# Altium PCB system.PcbDoc
Units mm, origin at the board's own origin, x right, y up, seen from the top; angles counter-clockwise.
Board outline 25.03 x 28.54 mm, 2 copper layers (Top Layer, Bottom Layer); 52 components, 34 nets, 171 pads, 0 vias.
Unrouted connection lines stored in the file: 118.
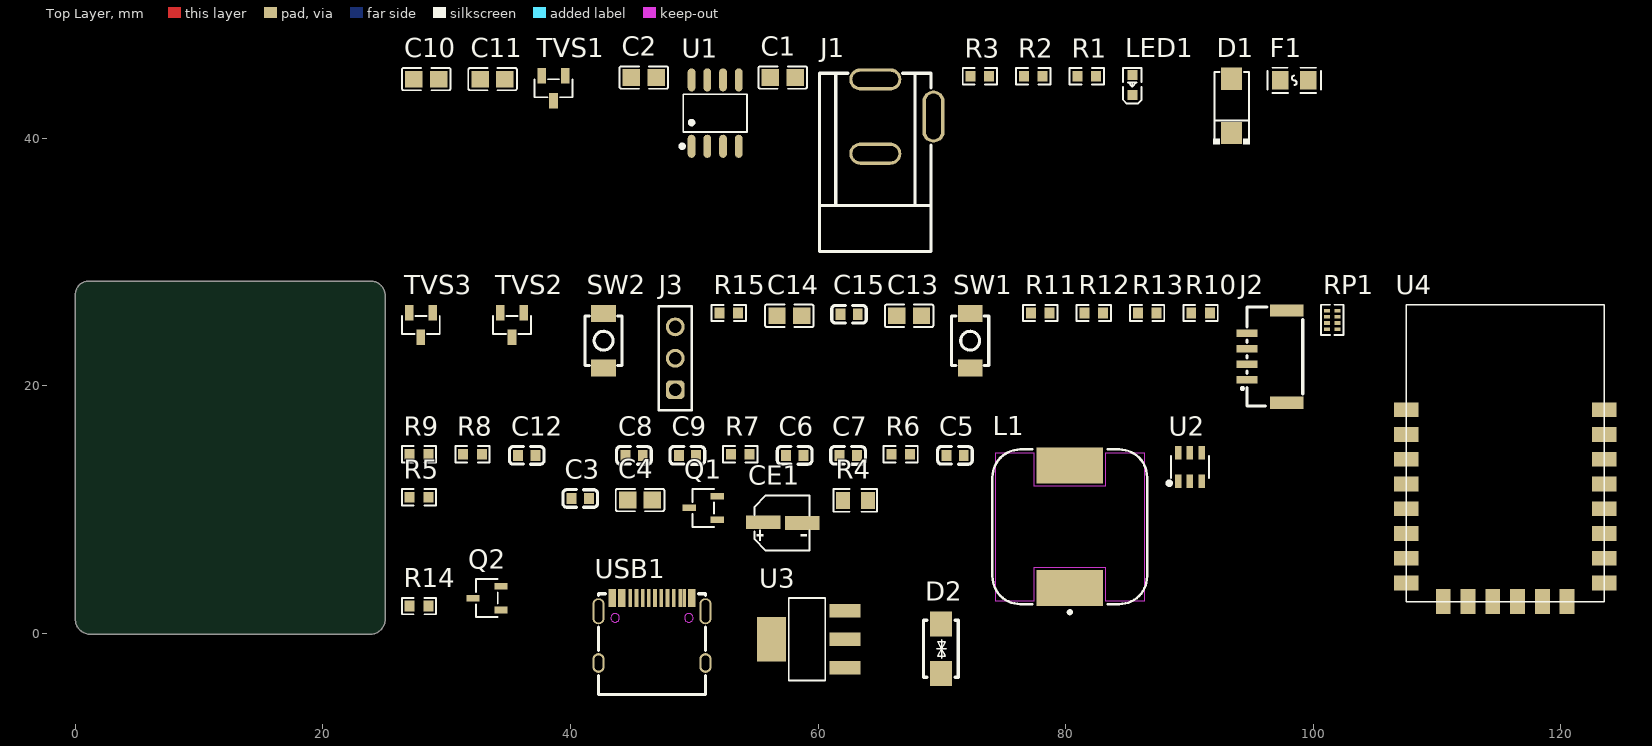
[diagram p0: Top Layer view]
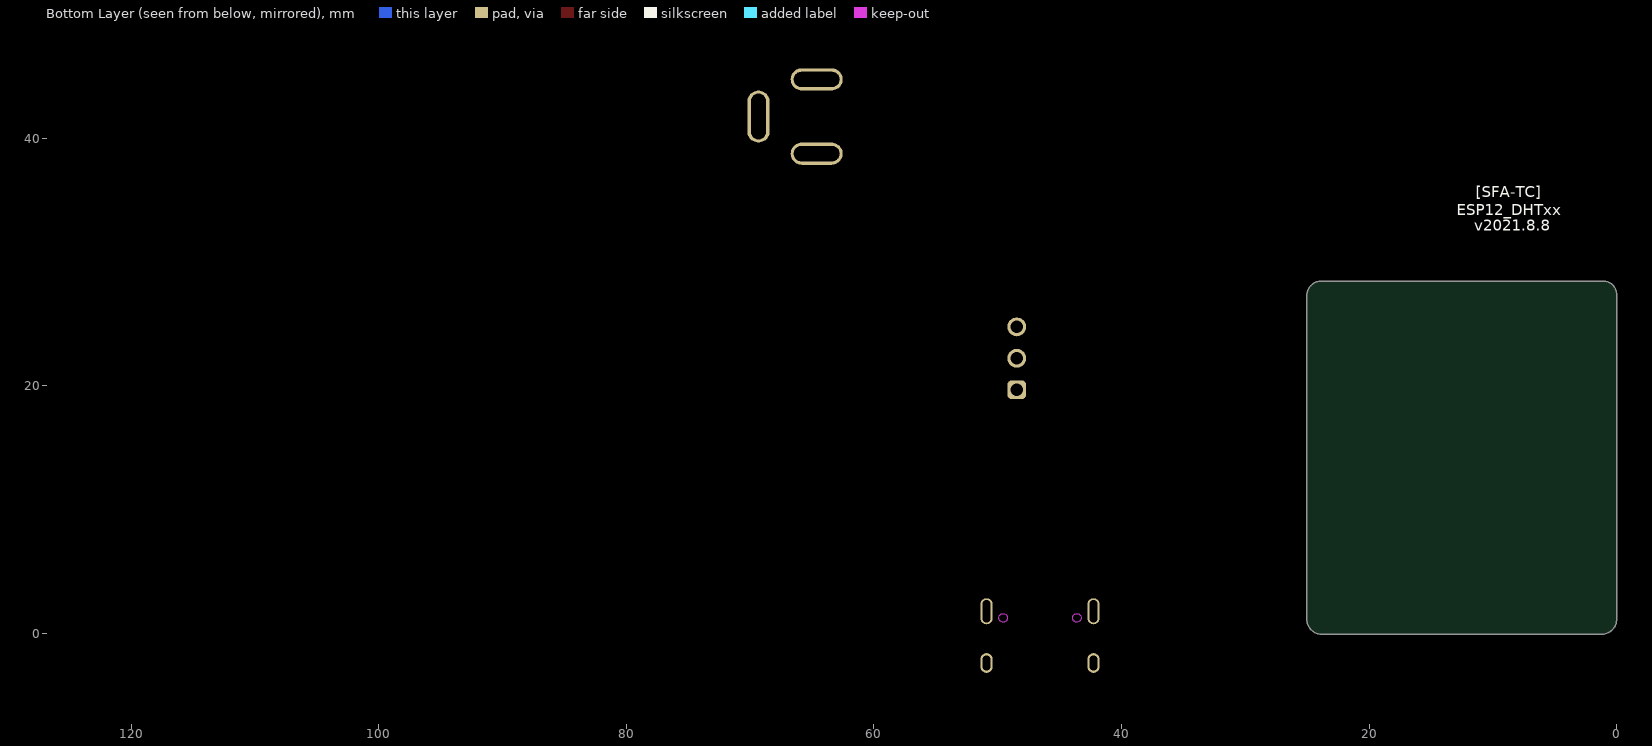
[diagram p1: Bottom Layer view, seen from below]

## Layer stack, top to bottom
Top Solder: solder mask 0.0102, Solder Resist, Dk 3.5
Top Layer: signal copper 0.0356
Dielectric 1: dielectric 0.32, FR-4, Dk 4.8
Bottom Layer: signal copper 0.0356
Bottom Solder: solder mask 0.0102, Solder Resist, Dk 3.5

## Board outline
0,1.143 0,27.394 cw(c1.066,27.394) 1.066,28.46 23.864,28.46 cw(c23.864,27.305) 25.019,27.305 25.026,1.126 cw(c23.793,1.151) 23.767,-0.082 1.226,-0.083 cw(c1.226,1.143)

## Design rules (kind name [scope] priority, off if disabled: settings)
Clearance [All] p1: gap=0.254 ignorepadtopadclearanceinfootprint=FALSE except(0: Arc-Hole Track-Hole SMDPad-Hole THPad-Hole Via-Hole Fill-Hole Poly-Hole Region-Hole Text-Hole)
PolygonConnect [All] p1: connectstyle=Relief reliefconductorwidth=0.254 reliefentries=4 polygonreliefangle="90 Angle" airgapwidth=0.254
RoomDefinition Power [InComponentClass('Power')] p1: confinementstyle=ConfineIn formatcopy=TRUE lockcomponents=FALSE outline -79.629,-62.992 -28.829,-62.992 -28.829,-37.592 -79.629,-37.592
RoomDefinition ESP12F [InComponentClass('ESP12F')] p2: confinementstyle=ConfineIn formatcopy=TRUE lockcomponents=FALSE outline -79.629,-62.992 -28.829,-62.992 -28.829,-37.592 -79.629,-37.592
RoutingVias [All] p1: holewidth=0.2 width=0.4 viastyle="Through Hole" minholewidth=0.15 minwidth=0.4 maxholewidth=0.2 maxwidth=0.4
SolderMaskExpansion [All] p1: expansion=0.102 istentingtop=FALSE
Width Width_power [(InNet('3.3V') OR InNet('+5') OR InNet('GND'))] p1: maxlimit=1.016 minlimit=0.381 preferedwidth=0.762 minimp=50.000000 maximp=50.000000 favimp=50.000000
Width [All] p2: maxlimit=1.016 minlimit=0.254 preferedwidth=0.635 minimp=50.000000 maximp=50.000000 favimp=50.000000
30 further rules are at their usual default settings.

## Classes and differential pairs
component class Power: C1 C2 C3 C4 C5 C6 C7 C8 C9 C10 C11 C12 CE1 D1 D2 F1 J1 L1 LED1 Q1 Q2 R1 R2 R3 R4 R5 R6 R7 R8 R9 TVS1 U1 U2 USB1
component class ESP12F: C13 C14 C15 J2 J3 R10 R11 R12 R13 R14 R15 RP1 SW1 SW2 TVS2 TVS3 U4

## Components (designator, comment, footprint, x,y, rotation, side; value= is the part's Value field where it differs from the comment)
C1 "F ±5%_X7R" C0805 57.15,44.907 r0 top
C2 "F ±5%_X7R" C0805 45.923,44.907 r0 top
C3 "100nF ±5%_X7R" C0603 40.792,10.897 r0 top
C4 "10uF ±5%_X7R" C0805 45.618,10.77 r0 top
C5 "100nF ±5%_X7R" C0603 71.069,14.376 r0 top
C6 "10uF ±5%_X7R" C0603 58.115,14.376 r0 top
C7 "100nF ±5%_X7R" C0603 62.433,14.376 r0 top
C8 "22uF ±5%_X7R" C0603 45.136,14.376 r0 top
C9 "22uF ±5%_X7R" C0603 49.454,14.376 r0 top
C10 "F ±5%_X7R" C0805 28.346,44.78 r0 top
C11 "F ±5%_X7R" C0805 33.706,44.78 r0 top
C12 "75pF ±5%_X7R" C0603 36.474,14.376 r0 top
C13 "100nF ±5%_X7R" C0805 67.361,25.654 r0 top
C14 "10uF ±5%_X7R" C0805 57.683,25.654 r0 top
C15 "100nF ±5%_X7R" C0603 62.509,25.781 r0 top
CE1 "100uF / 16V" CAP-SMD 57.074,8.915 r0 top
D1 "SMAJ6.0A_C152112" SMA_L4.4-W2.6-LS5.0-RD 93.421,42.621 r90 top
D2 "SMAJ5.0CA-13-F" SMA_L4.4-W2.6-LS5.0-BI 69.926,-1.245 r90 top
F1 "BSMD0805-050-6V" F0805 98.476,44.679 r0 top
J1 "DC-005-2.5A" CONN-TH_DC-005-2.5A-2.0 66.98,41.758 r90 top
J2 "GH1.25-4P" GH1.25-4P 96.571,22.327 r90 top
J3 "61300311821" 61300311821 48.463,22.225 r90 top
L1 "10uH, 7A" WE-PD_1280 80.34,8.611 r0 top
LED1 "LED" LED0603-RD 85.395,44.298 r90 top
Q1 "SSM3J328R-LF" SOT-23-3_L2.9-W1.4-P1.91-LS2.6-BR 50.724,10.135 r0 top
Q2 "SSM3J328R-LF" SOT-23-3_L2.9-W1.4-P1.91-LS2.6-BR 33.249,2.845 r0 top
R1 "5.1kΩ ±1% 100mW" R0603 81.712,45.009 r0 top
R2 "4.7kΩ ±1% 100mW" R0603 77.394,45.009 r0 top
R3 "5.1kΩ ±1% 100mW" R0603 73.076,45.009 r0 top
R4 "0" R0805 63.017,10.744 r0 top
R5 "10kΩ ±1% 100mW" R0603 27.762,10.998 r0 top
R6 "NC" R0603 66.675,14.478 r0 top
R7 "49.9Ω ±1% 100mW" R0603 53.721,14.478 r0 top
R8 "100kΩ ±1% 100mW" R0603 32.08,14.478 r0 top
R9 "13.3kΩ ±1% 100mW" R0603 27.762,14.478 r0 top
R10 "10kΩ ±1% 100mW" R0603 90.907,25.883 r0 top
R11 "10kΩ ±1% 100mW" R0603 77.953,25.883 r0 top
R12 "22Ω ±1% 100mW" R0603 82.271,25.883 r0 top
R13 "10kΩ ±1% 100mW" R0603 86.589,25.883 r0 top
R14 "10kΩ ±1% 100mW" R0603 27.762,2.21 r0 top
R15 "10kΩ ±1% 100mW" R0603 52.781,25.883 r0 top
RP1 "22Ω ±1% 100mW" RES-ARRAY-SMD_0402-8P-L2.0-W1.0-BL 101.549,25.324 r90 top value=30Ω
SW1 "TS-1185-B-A-B-A" SW-SMD_L4.0-W3.0-LS5.0 72.288,23.647 r90 top
SW2 "TS-1185-B-A-B-A" SW-SMD_L4.0-W3.0-LS5.0 42.672,23.647 r90 top
TVS1 "TPPESD5V2S2UT" SOT-23-3_L2.9-W1.3-P1.90-LS2.4-BR 38.633,44.044 r90 top
TVS2 "TPPESD5V2S2UT" SOT-23-3_L2.9-W1.3-P1.90-LS2.4-BR 35.281,24.917 r90 top
TVS3 "TPPESD5V2S2UT" SOT-23-3_L2.9-W1.3-P1.90-LS2.4-BR 27.915,24.917 r90 top
U1 "CH340N" SOP-8_L4.9-W3.9-P1.27-LS6.0-BL 51.689,42.037 r0 top
U2 "TPS54302DDCR" SOT-23-6_L2.9-W1.6-P0.95-LS2.8-BL 90.043,13.437 r0 top
U3 "1117" SOT-223-3 59.207,-0.483 r0 top
U4 "ESP-12E&F" ESP-12E 107.518,2.565 r0 top
USB1 "USB-C 16P" USB-C-16P 46.584,0.152 r0 top

## Footprints (in the part's own frame and the unit in brackets; to place one, negate y for a bottom-side part, rotate by r counter-clockwise, add the part's x,y. Pads: shape width x height; smd on the part's side, far side on the other; paste and mask are expansions set on the pad)
61300311821 [mm] "Socket Header, Pitch 2.54 mm, THT, Vertical, single row, 3p"
  rrect50% 1.52x1.52 hole 1.02: 1(-2.54,0)
  round 1.52 hole 1.02: 2(0,0) 3(2.54,0)
  silkscreen extent -4.19,-1.35 4.19,1.35, body extent -4.06,-1.25 4.06,1.25, height 8.55
C0603 [mm]
  rect 0.8x0.9 smd mask+0.051: 1(-0.7,0) 2(0.7,0)
  silkscreen extent -1.41,-0.71 1.39,0.72, body extent -0.8,-0.4 0.8,0.4, height 0.8
C0805 [mm]
  rect 1.41x1.35 smd mask+0.051: 1(-1,0) 2(1,0)
  silkscreen extent -1.96,-0.9 1.96,0.9, body extent -1,-0.66 1,0.64, height 1.3
CAP-SMD [mm] "BD4.0-L4.3-W4.3-FD-LS5.3"
  rect 2.8x1.1 smd mask+0.051: 1(-1.499,0.051) 2(1.661,0)
  silkscreen extent -2.22,-2.23 2.24,2.23, body extent -2.65,-2.16 2.65,2.14, height 5.42
CONN-TH_DC-005-2.5A-2.0 [mm]
  oval 1.8x4.2 hole 1.2 slot 3.7 at 90 deg: 1(3,2.35) 2(-3,2.35)
  oval 4.2x1.8 hole 1.2 slot 3.7 at 0 deg: 3(0,-2.35)
  silkscreen extent -10.9,-2.15 3.5,6.85, body extent -10.67,-2.49 3.38,6.81, height 11
ESP-12E [mm]
  rect 2x1.2 smd: 1(0,15.5) 2(0,13.5) 3(0,11.5) 4(0,9.5) 5(0,7.5) 6(0,5.5) 7(0,3.5) 8(0,1.5) 15(16,1.5) 16(16,3.5) 17(16,5.5) 18(16,7.5) 19(16,9.5) 20(16,11.5) 21(16,13.5) 22(16,15.5)
  rect 1.2x2 smd: 9(3,0) 10(5,0) 11(7,0) 12(9,0) 13(11,0) 14(13,0)
  silkscreen extent 0,0 16,24
F0805 [mm]
  rect 1.335x1.5 smd paste-100 mask+0.051: 1(-1.142,0) 2(1.142,0)
  silkscreen extent -2.16,-1.02 2.16,1.02, body extent -1.05,-0.71 1.05,0.69, height 0.8
GH1.25-4P [mm]
  rect 0.6x1.7 smd mask+0.05: 1(-1.845,1.905) 2(-0.595,1.905) 3(0.655,1.905) 4(1.905,1.905)
  rect 1x2.7 smd mask+0.05: 5(-3.695,-1.296) 6(3.755,-1.296)
  silkscreen extent -3.97,-2.59 4.03,2.39, body extent -4.13,-2.67 4.13,2.19, height 4.26
LED0603-RD [mm]
  rect 0.8x0.8 smd paste+0 mask+0.051: 1(-0.799,-0.003) 2(0.799,0.003)
  silkscreen extent -1.49,-0.75 1.39,0.76
R0603 [mm]
  rect 0.806x0.864 smd mask+0.051: 1(-0.753,0) 2(0.753,0)
  silkscreen extent -1.39,-0.66 1.39,0.66, body extent -0.84,-0.4 0.78,0.41, height 0.45
R0805 [mm]
  rect 1.133x1.377 smd mask+0.051: 1(-1,0) 2(1,0)
  silkscreen extent -1.76,-0.92 1.76,0.92, body extent -0.99,-0.66 1.01,0.64, height 0.61
RES-ARRAY-SMD_0402-8P-L2.0-W1.0-BL [mm]
  rect 0.3x0.505 smd: 1(-0.75,0.427) 2(-0.25,0.427) 3(0.25,0.427) 4(0.75,0.427) 5(0.75,-0.427) 6(0.25,-0.427) 7(-0.25,-0.427) 8(-0.75,-0.427)
  silkscreen extent -1.23,-0.91 1.23,0.91
SMA_L4.4-W2.6-LS5.0-BI [mm]
  rect 2x1.8 smd: 1(-2,0) 2(2,0)
  silkscreen extent -2.3,-1.4 2.3,1.4, body extent -2.6,-1.27 2.6,1.23, height 2.1
SMA_L4.4-W2.6-LS5.0-RD [mm]
  rect 1.8x1.7 smd paste+0 mask+0.051: 1(-2.192,0) 2(2.192,0)
  silkscreen extent -3.11,-1.48 2.73,1.48, body extent -2.6,-1.24 2.6,1.26, height 2.1
SOP-8_L4.9-W3.9-P1.27-LS6.0-BL [mm]
  oval 0.63x1.865 smd: 1(-1.905,-2.682) 2(-0.635,-2.682) 3(0.635,-2.682) 4(1.905,-2.682) 5(1.905,2.682) 6(0.635,2.682) 7(-0.635,2.682) 8(-1.905,2.682)
  silkscreen extent -2.82,-2.83 2.58,1.52
SOT-23-3_L2.9-W1.3-P1.90-LS2.4-BR [mm]
  rect 1.25x0.7 smd: 1(1,-0.95) 2(1,0.95) 3(-1,0)
  silkscreen extent -0.73,-1.53 0.73,1.53
SOT-23-3_L2.9-W1.4-P1.91-LS2.6-BR [mm]
  rect 1.07x0.532 smd: 1(1.135,-0.955) 2(1.135,0.955) 3(-1.135,0)
  silkscreen extent -0.88,-1.54 0.88,1.54
SOT-23-6_L2.9-W1.6-P0.95-LS2.8-BL [mm]
  rect 0.532x1.072 smd: 1(-0.95,-1.149) 2(0,-1.149) 3(0.95,-1.149) 4(0.95,1.149) 5(0,1.149) 6(-0.95,1.149)
  silkscreen extent -1.82,-1.45 1.54,0.89, body extent -1.43,-1.4 1.45,1.4, height 1.64
SOT-223-3 [mm] "L6.5-W3.4-P2.30-LS7.0-BR"
  rect 2.5x1.1 smd mask+0.051: 1(2.97,-2.3) 2(2.97,0) 3(2.97,2.3)
  rect 2.34x3.6 smd mask+0.051: 4(-2.97,0)
  silkscreen extent -1.57,-3.33 1.37,3.33, body extent -3.57,-3.25 3.54,3.25, height 1.75
SW-SMD_L4.0-W3.0-LS5.0 [mm]
  rect 1.35x2 smd: 1(-2.2,0) 2(2.2,0)
  silkscreen extent -2,-1.5 2,1.5, body extent -2.51,-1.5 2.49,1.5, height 2
USB-C-16P [mm]
  oval 1.001x1.6 hole 0.599 slot 1.199 at 90 deg paste+0 mask+0.051: 0(-4.321,-2.548) 0(4.321,-2.548)
  oval 1.001x2.101 hole 0.599 slot 1.801 at 90 deg paste+0 mask+0.051: 0(-4.321,1.633) 0(4.321,1.633)
  rect 0.3x1.45 smd: A1(-3.071,2.7) A4(-2.309,2.7) A5(-1.25,2.7) A6(-0.25,2.7) A7(0.25,2.7) A8(1.25,2.7) A9(2.291,2.7) A12(3.079,2.7) B1(3.384,2.7) B4(2.596,2.7) B5(1.75,2.7) B6(0.75,2.7) B7(-0.75,2.7) B8(-1.75,2.7) B9(-2.614,2.7) B12(-3.376,2.7)
  Keep-Out Layer board cut-out: 3.33,1.102 3.295,1.254 3.198,1.376 3.057,1.444 2.901,1.444 2.761,1.376 2.664,1.254 2.629,1.102 2.629,1.102 2.664,0.95 2.761,0.828 2.901,0.761 3.057,0.761 3.198,0.828 3.295,0.95 3.33,1.102
  Keep-Out Layer board cut-out: -2.629,1.102 -2.664,1.254 -2.761,1.376 -2.901,1.444 -3.057,1.444 -3.198,1.376 -3.295,1.254 -3.33,1.102 -3.33,1.102 -3.295,0.95 -3.198,0.828 -3.057,0.761 -2.901,0.761 -2.761,0.828 -2.664,0.95 -2.629,1.102
  silkscreen extent -4.32,-5.08 4.32,3.05, body extent -4.49,-5.02 4.44,2.73, height 3.29
WE-PD_1280 [mm] "SMT Shielded Power Inductor, 2-leads, body 12x12mm"
  rect 5.4x2.9 smd: 1(0,-4.95) 2(0,4.95)
  Top Layer keep-out region: -6,6 -2.9,6 -2.9,3.3 2.9,3.3 2.9,6 6,6 6,-6 2.9,-6 2.9,-3.3 -2.9,-3.3 -2.9,-6 -6,-6
  silkscreen extent -6.25,-7.02 6.25,6.25, body extent -6,-6 6,6, height 7.51

## Part data
C1 C2 C3 C4 C5 C6 C7 C8 C9 C10 C11 C12 C13 C14 C15: library part Cap, "Capacitor", LatestRevisionDate=17-Jul-2002, LatestRevisionNote="Re-released for DXP Platform.", PackageDescription="Radial Cap, Thru-Hole; 2 Leads; 0.3 in Pin Spacing", PackageReference=RAD-0.3, Published=8-Jun-2000, Publisher="Altium Limited"
CE1: library part "Cap Pol", "Polarized Capacitor (Axial)", LatestRevisionDate=17-Jul-2002, LatestRevisionNote="Re-released for DXP Platform.", PackageDescription="Polarized Capacitor; 2 Leads", PackageReference=POLAR0.8, Published=8-Jun-2000, Publisher="Altium Limited"
D1: Breakdown Voltage=6.67V, JLCPCB Part Class="Extended Part", LCSC Part Name="单向 Vrwm:6V", Manufacturer=BORN(伯恩半导体), Manufacturer Part=SMAJ6.0A, Maximum Clamping Voltage=10.3V, Peak Pulse Current (Ipp)@10/1000μs=38.8A, Reverse Stand-Off Voltage (Vrwm)=6V, Add into BOM=yes, Convert to PCB=yes, Datasheet=https://atta.szlcsc.com/upload/public/pdf/source/20180207/C152112_15179949389561359152.pdf, Device=SMAJ6.0A_C152112, Name=SMAJ6.0A, Polarity=单向, Supplier=LCSC, Supplier Footprint=SMA(DO-214AC), Supplier Part=C152112, Symbol=SMAJ6.0A_C152112
D2: library part SMAJ5.0CA, Breakdown Voltage (Max)=7.25V, Breakdown Voltage (Min)=6.4V, JLCPCB Part Class="Extended Part", LCSC Part Name="双向 Vrwm:5V 400W", Manufacturer=DIODES(美台), Maximum Clamping Voltage=9.2V, Peak Pulse Current (Ipp)@10/1000μs=-, Peak Pulse Power Dissipation (Ppp)@10/1000μs=400W, Reverse Leakage Current (Ir)=800uA, Reverse Stand-Off Voltage (Vrwm)=5V, Add into BOM=yes, Convert to PCB=yes, Datasheet=https://atta.szlcsc.com/upload/public/pdf/source/20180308/C134993_15204896803081413896.pdf, Device=SMAJ5.0CA-13-F, Manufacturer Part=SMAJ5.0CA-13-F, Name=SMAJ5.0CA-13-F, Polarity=双向, Supplier=LCSC, Supplier Footprint=SMA(DO-214AC), Supplier Part=C134993, Symbol=SMAJ5.0CA-13-F
F1: Current Rating (Max)=40A, Hold Current=500mA, JLCPCB Part Class="Extended Part", LCSC Part Name="6V 500mA 0805自恢复", Manufacturer=BHFUSE(佰宏), Operating Temperature=-40℃~+85℃, Operating Voltage (Max)=6V, Power Dissipation=500mW, Resistance - Initial (Ri) (Min)=100mΩ, Resistance - Post Trip (R1) (Max)=850mΩ, Trip Current=1A, Add into BOM=yes, Convert to PCB=yes, Datasheet=https://atta.szlcsc.com/upload/public/pdf/source/20220223/3FD8E8A8A3681642EAEF465E16495357.pdf, Device=BSMD0805-050-6V, Manufacturer Part=BSMD0805-050-6V, Maximum Time to Trip=100ms, Name=BSMD0805-050-6V, Supplier=LCSC, Supplier Footprint=0805, Supplier Part=C883108, Symbol=BSMD0805-050-6V
J1: library part DC-005, Current Rating (Max)=2.5A, JLCPCB Part Class="Extended Part", LCSC Part Name="DC电源插座 内径:2.5mm 外径:6.2mm", Manufacturer="XKB Connectivity(中国星坤)", Manufacturer Part=DC-005-2.5A-2.5, Operating Temperature Range=-20℃~+70℃, Voltage Rating (Max)=24V, Welding Temperature (Max)=260℃, Add into BOM=yes, Connector Type=DC电源插座, Contact Material=黄铜, Convert to PCB=yes, Datasheet=https://atta.szlcsc.com/upload/public/pdf/source/20220901/6F9138B665EDB96A8FB5BCA403DC5722.pdf, Device=DC-005-2.5A-2.5, Inside Contact Diameter=2.5mm, Name=DC-005-2.5A-2.5, Outside Contact Diameter=6.2mm, Supplier=LCSC, Supplier Footprint=插件, Supplier Part=C319098, Symbol=DC-005-2.5A-2.5
J2: JLCPCB Part Class="Extended Part", LCSC Part Name=GH1.25-5P立贴编带加盖, Manufacturer=BOOMELE(博穆精密), Manufacturer Part=GH1.25-5PLTPZ, Add into BOM=yes, Convert to PCB=yes, Datasheet=https://atta.szlcsc.com/upload/public/pdf/source/20211125/08A09A4909F58AF780B71FE423A00F7E.pdf, Device=GH1.25-5PLTPZ, Name=GH1.25-5PLTPZ, Supplier=LCSC, Supplier Footprint=-, Supplier Part=C2829263, Symbol=GH1.25-5PLTPZ
J3: "WR-PHD Socket Header, THT, Vertical, pitch 2.54mm, 1 Row, 3P", Contact Resistance=20mΩ, Manufacturer="Wurth Elektronik", Operating Temperature Max=125°C, Operating Temperature Min=-40°C, Rated Current=3A, Withstanding Voltage=500V, Working Voltage=250V, Category="Board-to-Board Connectors", ComponentLink1Description="Website Link", ComponentLink1URL=https://www.we-online.com/redexpert/article/61300311821?ad, ComponentLink2Description="Datasheet Link", ComponentLink2URL=https://www.we-online.com/redexpert/spec/61300311821?ad, Gender="Socket Header", Manufacturer Part Number=61300311821, Match Code=WR-PHD, Mount="Through Hole", Number of Pins=3, Number of Rows=1, Orientation=Vertical, Packaging=Tray, Pitch=2.54mm
L1: library part 74477010, "WE-PD SMT Power Inductor, size 1280, 10uH, 7A, 20mOhm", Case/Size Code=1280, DC Resistance=15mOhm, DC Resistance Max=20mOhm, Inductance=10uH, Manufacturer="Wurth Elektronik", Operating Temperature Max=125°C, Operating Temperature Min=-40°C, Rated Current=7A, Saturation Current=7.5A, Self Resonant Frequency=18MHz, Category="Power Inductors", ComponentLink1Description="Website Link", ComponentLink1URL=https://www.we-online.com/redexpert/article/74477010?ad, ComponentLink2Description="Datasheet Link", ComponentLink2URL=https://www.we-online.com/redexpert/spec/74477010?ad, Height=8mm, Length=12mm, Manufacturer Part Number=74477010, Match Code=WE-PD, Mount="Surface Mount", Packaging="Tape and Reel", Type=Standard, Width=12mm
LED1: "发光颜色:", Emitted Color=红灯, JLCPCB Part Class="Extended Part", Manufacturer=EVERLIGHT(亿光), Manufacturer Part=17-21SURC/S530-A2/TR8, Add into BOM=yes, Convert to PCB=yes, Datasheet=https://atta.szlcsc.com/upload/public/pdf/source/20170918/C131244_1505726880590976254.pdf, Device=17-21SURC/S530-A2/TR8, LCSC Part Name=红灯, Name=17-21SURC/S530-A2/TR8, Supplier=LCSC, Supplier Footprint=0805, Supplier Part=C131244, Symbol=17-21SURC/S530-A2/TR8
Q1 Q2: library part MOSFET, LCSC Part Name=SSM3J328R-VB, Manufacturer=VBsemi(微碧), Add into BOM=yes, Convert to PCB=yes, Datasheet=https://atta.szlcsc.com/upload/public/pdf/source/20230809/B11CEF1749BD8B4A43E8BE92C63E6317.pdf, Device=SSM3J328R-VB, Manufacturer Part=SSM3J328R-VB, Name=SSM3J328R-VB, Supplier=LCSC, Supplier Footprint=SOT-23(TO-236), Supplier Part=C7494583, Symbol=SSM3J328R-VB
R1 R2 R3 R4 R5 R6 R7 R8 R9 R10 R11 R12 R13 R14 R15: library part Res, "Resistor", LatestRevisionDate=17-Jul-2002, LatestRevisionNote="Re-released for DXP Platform.", PackageDescription="Axial Device, Thru-Hole; 2 Leads; 0.3 in Pin Spacing", PackageReference=AXIAL-0.3, Published=8-Jun-2000, Publisher="Altium Limited"
RP1: library part RP, JLCPCB Part Class="Extended Part", LCSC Part Name="30Ω ±5% 0402x4", Manufacturer=YAGEO(国巨), Manufacturer Part=YC124-JR-0730RL, Number of Resistors=4, Power(Watts)=62.5mW, Temperature Coefficient=±200ppm/℃, Tolerance=±5%, Add into BOM=yes, Convert to PCB=yes, Datasheet=https://atta.szlcsc.com/upload/public/pdf/source/20171116/C136847_15108221195481123713.pdf, Device=YC124-JR-0730RL, Name=30Ω, Number of Pins=8, Supplier=LCSC, Supplier Footprint=0402x4, Supplier Part=C136847, Symbol=YC124-JR-0730RL
SW1 SW2: library part Button, "触点电流：50mA 额定电压(DC)：12V 电路结构：单刀单掷 安装方式：立贴 带灯：无 作用力：160gf 机械寿命：10万次 带支架：否 轻触开关3x4x2贴片2脚小龟 160gf", Actuator/Cap Color=黑色, Contact Current=50mA, Insulation Resistance=-, JLCPCB Part Class="Extended Part", LCSC Part Name="4*3*2mm 立贴 轻触开关", Manufacturer="XKB Connectivity(中国星坤)", Operating Force=160gf, Operating Temperature=-30℃~+85℃, Voltage Rating (DC)=12V, Actuator Style=圆形按钮, Add into BOM=yes, Circuit=单刀单掷, Convert to PCB=yes, Datasheet=https://atta.szlcsc.com/upload/public/pdf/source/20211011/C2F26DC0AE1820400F54DBF49644F5A1.pdf, Device=TS-1185-B-A-B-A, Manufacturer Part=TS-1185-B-A-B-A, Mechanical Life=10万次, Mounting Style=立贴, Name=TS-1185-B-A-B-A, Strike Gundam=否, Supplier=LCSC, Supplier Footprint=SMD, Supplier Part=C561517, Switch Height=2mm, Switch Length=4mm, Switch Width=3mm, Symbol=TS-1185-B-A-B-A, With Lamp=无
TVS1 TVS2 TVS3: library part TVS, JLCPCB Part Class="Extended Part", Manufacturer="TECH PUBLIC(台舟)", Add into BOM=yes, Convert to PCB=yes, Datasheet=https://atta.szlcsc.com/upload/public/pdf/source/20210810/D18798CDF2FA9545B0B94BB525A81819.pdf, Device=TPPESD5V2S2UT, LCSC Part Name=TPPESD5V2S2UT, Manufacturer Part=TPPESD5V2S2UT, Name=TPPESD5V2S2UT, Supplier=LCSC, Supplier Footprint=SOT-23, Supplier Part=C558449, Symbol=TPPESD5V2S2UT
U1: JLCPCB Part Class="Extended Part", LCSC Part Name="USB转串口芯片 CH340", Manufacturer=WCH(南京沁恒), Add into BOM=yes, Convert to PCB=yes, Datasheet=https://atta.szlcsc.com/upload/public/pdf/source/20220223/82A45E4FF89B3EDCAD50B354450A7EF4.pdf, Device=CH340N, Manufacturer Part=CH340N, Name=CH340N, Supplier=LCSC, Supplier Footprint=SOP-8, Supplier Part=C2977777, Symbol=CH340N_C2977777
U2: Input Voltage=4.5V~28V, JLCPCB Part Class="Extended Part", LCSC Part Name="降压型 输入4.5V~28V 输出596mV~28V 3A", Manufacturer=TI(德州仪器), Operating Temperature=-40℃~+125℃@(TJ), Output Current (Max)=3A, Output Voltage=596mV~28V, Switching Frequency=400kHz, Add into BOM=yes, Convert to PCB=yes, Datasheet=https://atta.szlcsc.com/upload/public/pdf/source/20181023/C311983_0948EE70BFAD2011B492BD3F4CEA709D.pdf, Device=TPS54302DDCR, Function=降压型, Manufacturer Part=TPS54302DDCR, Name=TPS54302DDCR, Number of Outputs=1, Output Type=可调, Supplier=LCSC, Supplier Footprint=TSOT-23-6, Supplier Part=C311983, Symbol=TPS54302DDCR_C311983, Synchronous Rectification=是, Topology=降压式
U4: "ESP-12E&F Onboard Module"

## Nets (pads, with @x,y where several pads share a name; then routed paths per layer and width w, separated by ;. In a path a pad name is that pad's centre, name@x,y a point inside that pad or via, vN(x,y) a via of type N, cw(c..) or ccw(c..) an arc to the next point about the centre after c; other vN are vias at no path point)
+3V3: C2.2 C11.2 C14.2 C15.2 J2.2 J3.1 R2.1 R10.2 R11.1 R14.2 R15.2 U1.5 U3.2 U3.4 U4.8
+5V: C8.2 C9.2 C10.2 D2.2 J2.1 L1.2 Q2.3 R7.2 U3.3
+5V_USB: D1.1 F1.2 Q1.3
GND: C1.1 C2.1 C3.1 C4.1 C6.1 C7.1 C8.1 C9.1 C10.1 C11.1 C13.1 C14.1 C15.1 CE1.2 D1.2 D2.1 J1.3 J2.4 J2.5 J2.6 J3.3 LED1.2 R1.1 R3.2 R9.1 R13.2 SW1.1 SW2.1 TVS1.3 TVS2.3 TVS3.3 U1.3 U2.1 U3.1 U4.15 USB1.0 USB1.A1 USB1.A12 USB1.B1 USB1.B12
GPIO0: R15.1 SW2.2 TVS3.1 U4.18
NetC1_2: C1.2 U1.8
NetC5_1: C5.1 L1.1 U2.2
NetC5_2: C5.2 U2.6
NetC12_1: C12.1 R8.1 R9.2 U2.4
NetC12_2: C12.2 R7.1 R8.2
NetJ1_1: J1.1 R4.1
NetJ1_2: J1.2 Q1.1 Q2.1 R5.1
NetLED1_1: LED1.1 R2.2
NetQ1_2: Q1.2 Q2.2 R5.2
NetR1_2: R1.2 USB1.A5
NetR3_1: R3.1 USB1.B5
NetR6_1: R6.1 U2.5
NetR11_2: R11.2 U4.3
NetR12_1: R12.1 U4.17
NetR13_1: R13.1 U4.16
NetRP1_5: RP1.5 U4.22
NetRP1_6: RP1.6 U4.21
NetRP1_7: RP1.7 U4.20
NetRP1_8: RP1.8 U4.19
RST: C13.2 R10.1 SW1.2 U4.1
RXD: RP1.4 U1.7
Signal_IN1: J2.3 R12.2 TVS2.2
Signal_IN2: J3.2 R14.1 RP1.1 TVS2.1
Signal_IN3: RP1.2 TVS3.2
TXD: RP1.3 U1.6
USBD_N: TVS1.1 U1.2 USB1.A7 USB1.B7
USBD_P: TVS1.2 U1.1 USB1.A6 USB1.B6
VIN: C3.2 C4.2 C6.2 C7.2 CE1.1 R4.2 R6.2 U2.3
VUSB: F1.1 USB1.A4 USB1.A9 USB1.B4 USB1.B9
pads on no net: U1.4 U4.2 U4.4 U4.5 U4.6 U4.7 U4.9 U4.10 U4.11 U4.12 U4.13 U4.14 USB1.A8 USB1.B8

## Silkscreen, mask and mechanical layers (free items; w line width, h text height)
Bottom Overlay:
  text "[SFA-TC]" at 11.36,34.925 h1.52
  text "ESP12_DHTxx" at 12.929,33.452 h1.52
  text "v2021.8.8" at 11.506,32.199 h1.52